# EAGLE board opamp bandpass (EAGLE 9.1.2)
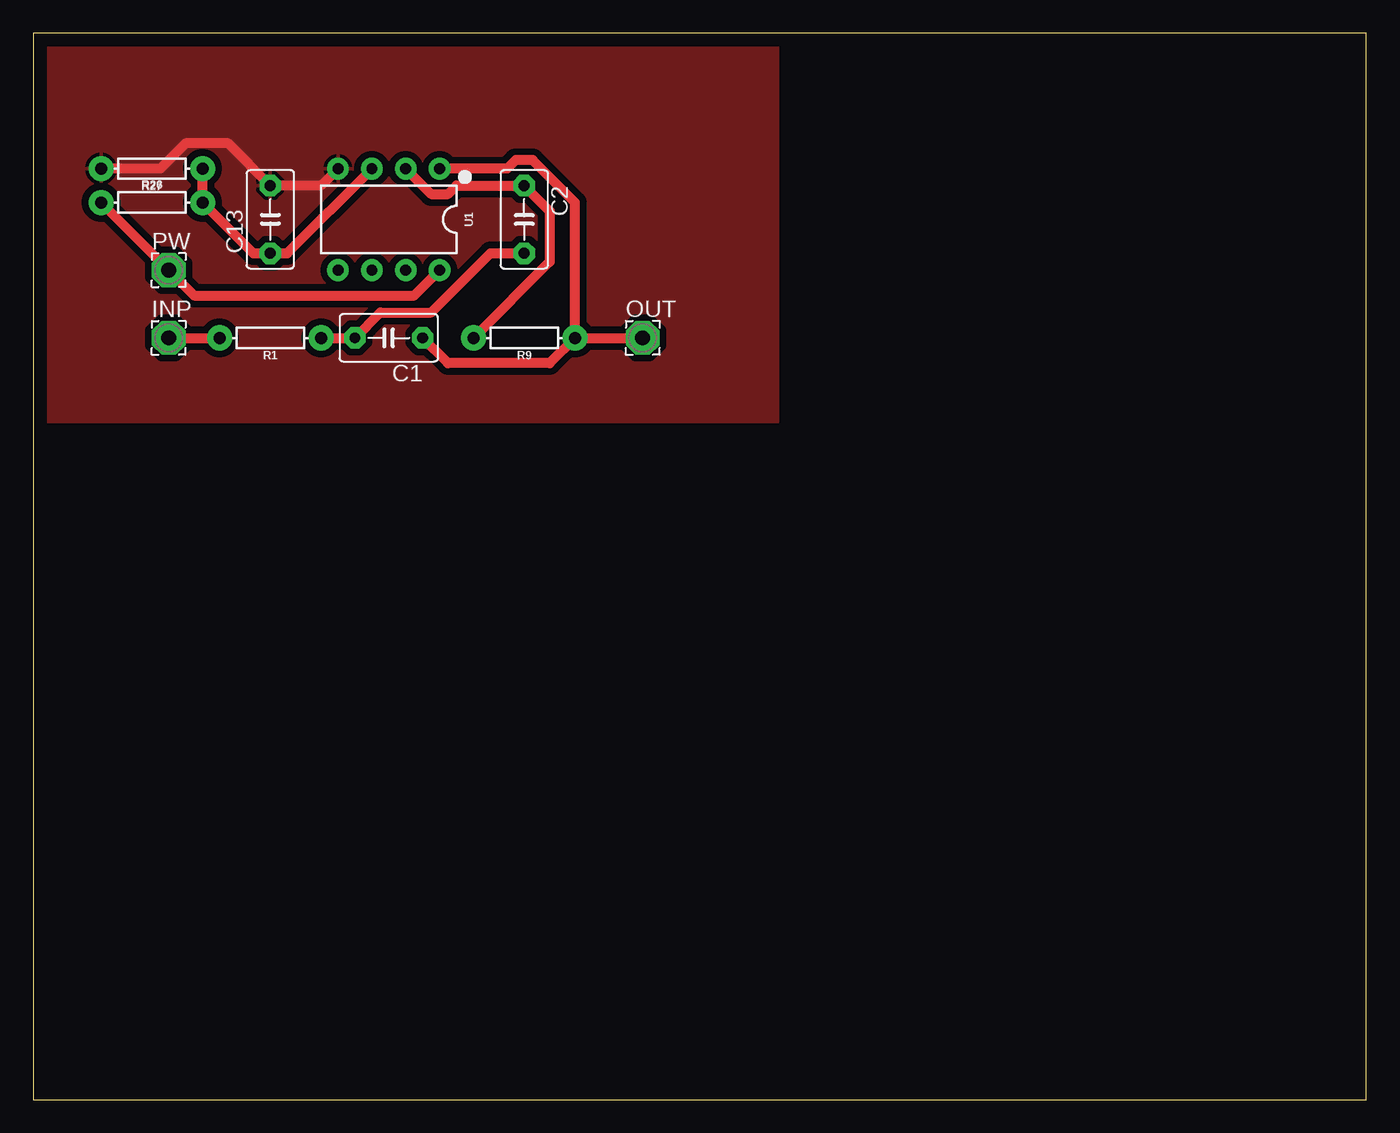
[diagram p0: board, top side]

Size 100 x 80 mm. Coordinates in mm from the lower left corner, seen from the top.
Outline: 0,0 100,0 100,80 0,80 0,0
Copper layers (1*16): Top 0.035mm / dielectric 1.5mm / Bottom 0.035mm
Design rules "default": minimum track width 6mil, minimum drill 0.35mm, track to track 6mil, track to pad 6mil, pad to pad 6mil, via to via 6mil, smd to smd 6mil, copper to edge 40mil, drill to drill 6mil, minimum pad ring 10mil, minimum via ring 8mil, stop-mask expansion 4mil, vias tented up to drill 0mil, thermal gap 10mil
Net classes: 0 default: width 0.762 mm, drill 0.762 mm, clearance 0.508 mm

## Footprints (pad centres in the part's own frame; a part is rotated, then mirrored left to right if it is on the bottom)
C5B3.5 = drill 0.813 pad 1.6 octagon: 1 -2.54,0; 2 2.54,0
2,54/1,1 = drill 1.118 pad 2.54 octagon: 1 0,0
AXIAL-0.3 = drill 0.9 pad 1.88: P$1 -3.81,0; P$2 3.81,0
DIP08 = drill 0.813 pad 1.626: 1 -3.81,-3.81; 2 -1.27,-3.81; 3 1.27,-3.81; 4 3.81,-3.81; 5 3.81,3.81; 6 1.27,3.81; 7 -1.27,3.81; 8 -3.81,3.81

## Placement (x,y rotation side)
C1  10nF  [C5B3.5]  26.67,57.15 180 top
C2  10nF  [C5B3.5]  36.83,66.04 270 top
C13  10uF  [C5B3.5]  17.78,66.04 90 top
INP  [2,54/1,1]  10.16,57.15 0 top
OUT  [2,54/1,1]  45.72,57.15 0 top
PW  [2,54/1,1]  10.16,62.23 0 top
R1  10k  [AXIAL-0.3]  17.78,57.15 180 top
R9  20k  [AXIAL-0.3]  36.83,57.15 180 top
R26  10k  [AXIAL-0.3]  8.89,67.31 0 top
R27  10k  [AXIAL-0.3]  8.89,69.85 180 top
U1  LM358  [DIP08]  26.67,66.04 180 top

## Library data of the parts
C1 C2 C13 = capacitor-wima
INP OUT PW = wirepad
R1 R9 R26 R27 = SparkFun-Resistors; PROD_ID: RES-12182
U1 = SparkFun-IC-Amplifiers; PROD_ID: IC-09172

## Nets
GND: C13.2 R27.P$2 U1.4
N$1: C1.2 C2.2 R1.P$1
N$4: C13.1 R26.P$2 R27.P$1 U1.3
N$7: C2.1 R9.P$2 U1.2
N$10: INP.1 R1.P$2
N$12: C1.1 OUT.1 R9.P$1 U1.1
VCC: PW.1 R26.P$1 U1.8

## Tracks (layer width: path | path; a pad name or v marks a point on that pad's centre or on a via)
GND
  Top 0.762: U1.4 21.59,68.58 C13.2 14.61,71.75 11.43,71.75 9.53,69.85 R27.P$2
  pour Top: 0,80.01 55.88,80.01 55.88,50.8 0,50.8
N$1
  Top 0.762: R1.P$1 C1.2 26.04,59.05 29.84,59.05 34.29,63.5 C2.2
N$4
  Top 0.762: U1.3 19.05,63.5 C13.1 16.51,63.5 R26.P$2 R27.P$1
N$7
  Top 0.762: U1.2 29.84,67.94 31.11,67.94 31.75,68.58 C2.1 38.73,66.67 38.73,62.87 R9.P$2
N$10
  Top 0.762: INP.1 R1.P$2
N$12
  Top 0.762: C1.1 31.11,55.24 38.73,55.24 R9.P$1 | U1.1 35.56,69.85 36.2,70.48 37.47,70.48 40.64,67.31 R9.P$1 | R9.P$1 OUT.1
VCC
  Top 0.762: U1.8 28.57,60.33 12.06,60.33 PW.1 R26.P$1